# Altium PCB XIREI-TCP_V1.PcbDoc
Units mil, origin at the board's own origin, x right, y up, seen from the top; angles counter-clockwise.
Board outline 6000 x 4000 mil, 2 copper layers (Top Layer, Bottom Layer); 75 components, 33 nets, 311 pads, 72 vias.
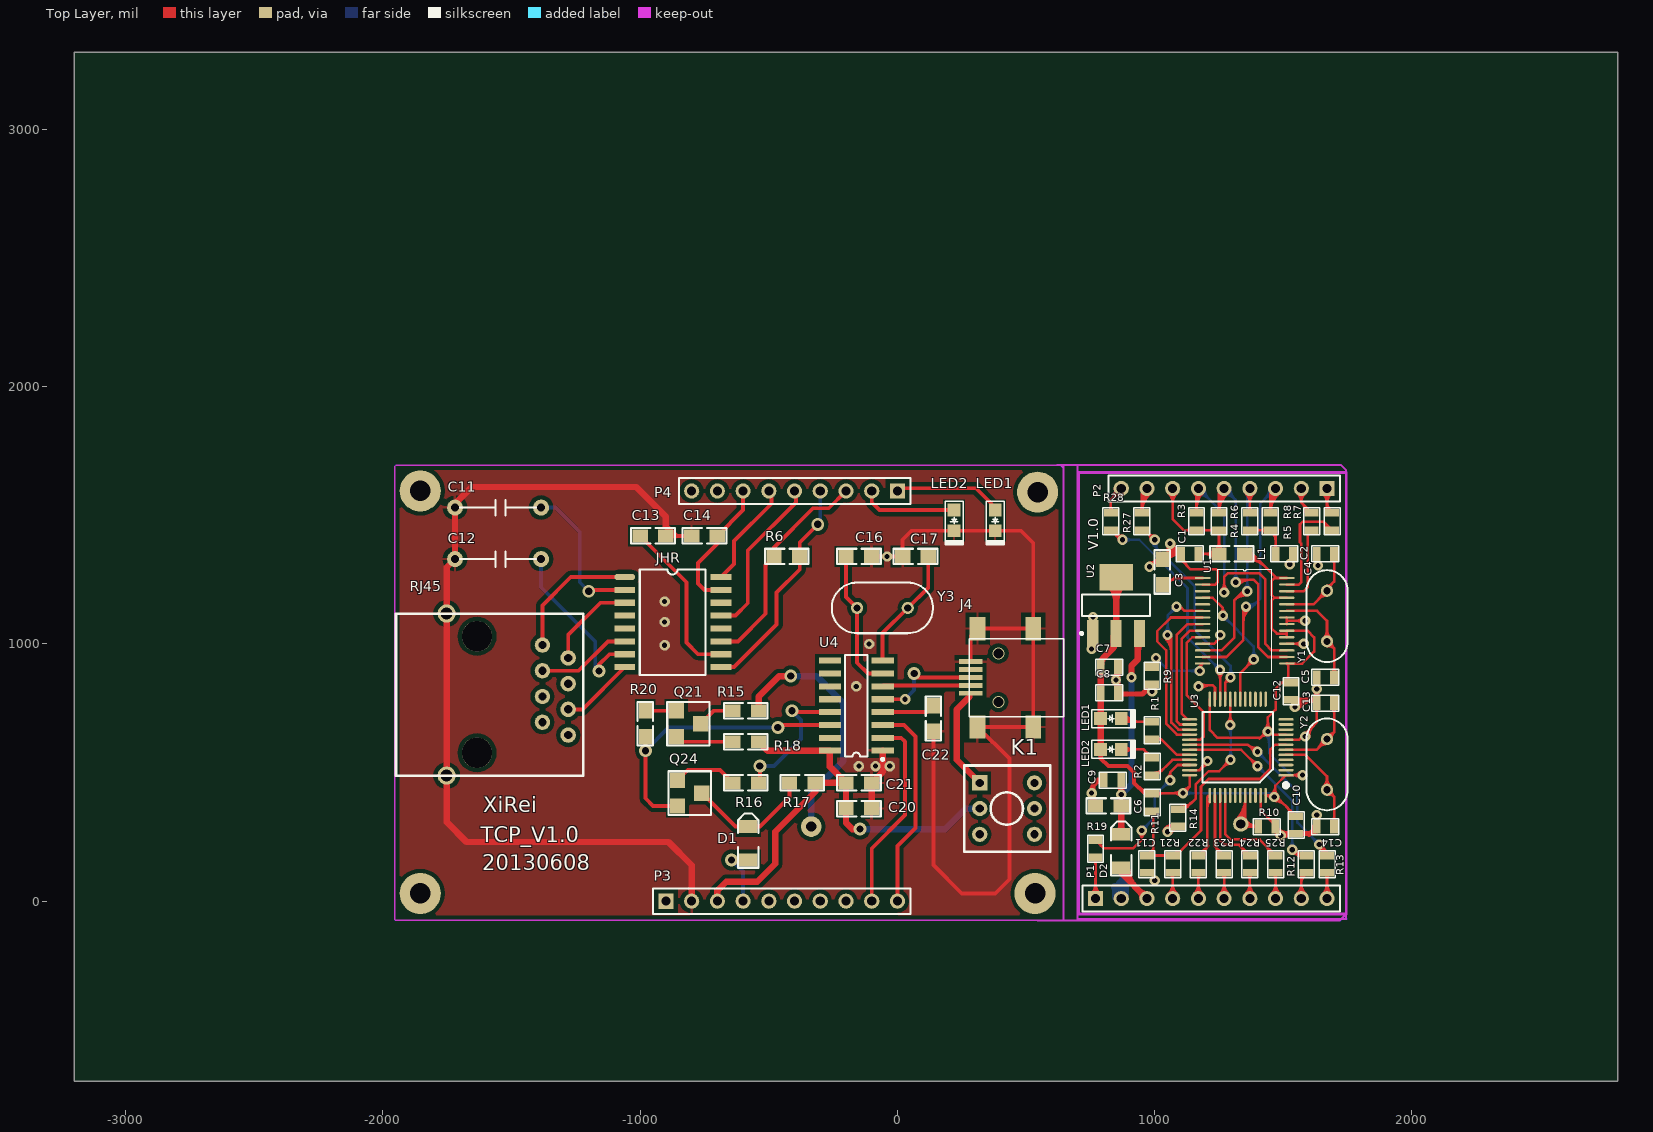
[diagram p0: Top Layer view]
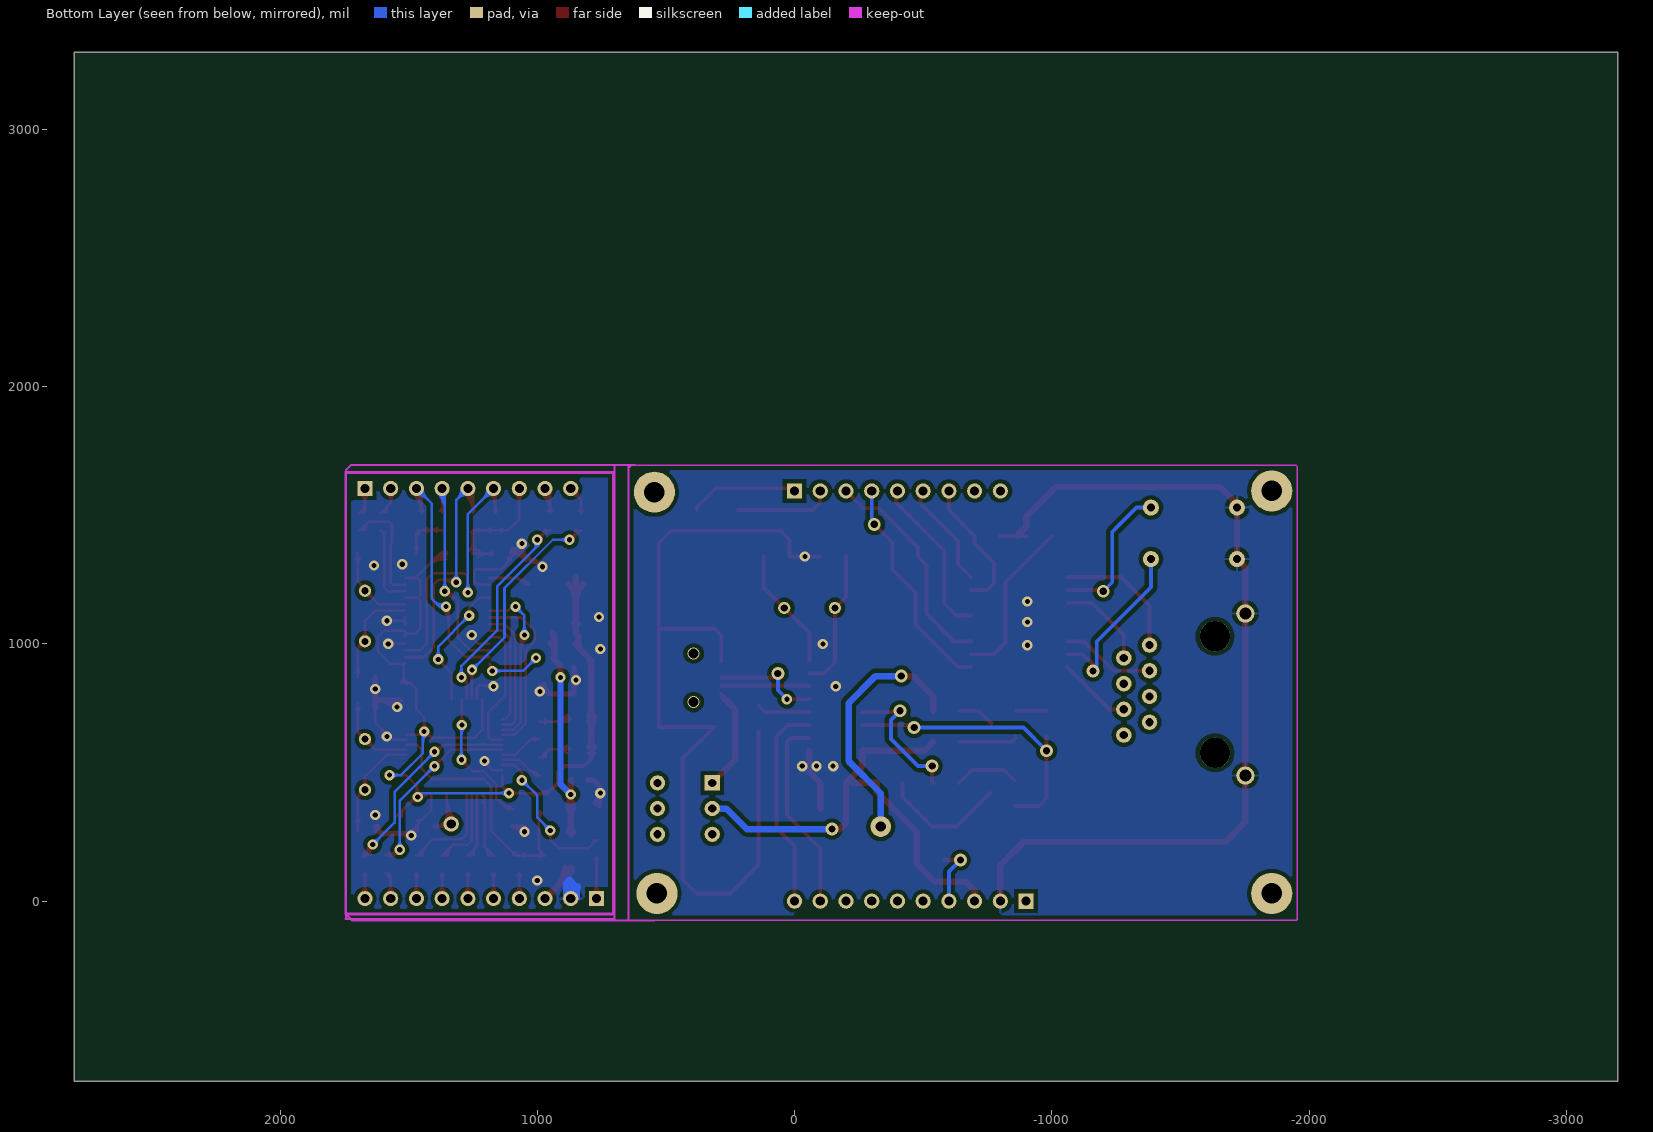
[diagram p1: Bottom Layer view, seen from below]

## Layer stack, top to bottom
Top Layer: signal copper 1.4
Dielectric: dielectric 12.6, FR-4, Dk 4.8
Bottom Layer: signal copper 1.4

## Board outline
-3200,-700 2800,-700 2800,3300 -3200,3300

## Design rules (kind name [scope] priority, off if disabled: settings)
Clearance [All] p1: gap=12
PolygonConnect [All] p1: connectstyle=Relief reliefconductorwidth=10 reliefentries=4 polygonreliefangle="90 Angle"
RoutingVias [All] p1: holewidth=20 width=40 viastyle="Through Hole" minholewidth=10 minwidth=20 maxholewidth=100 maxwidth=200
SilkscreenOverComponentPads [All] p1: minsilkscreentomaskgap=10
SolderMaskExpansion [All] p1: expansion=4
TestPointUsage [All] p1: valid=0 allowmultiple=FALSE
Testpoint [All] p1: side=15 testpointundercomponent=TRUE minsize=40 maxsize=100 preferedsize=60 minholesize=0 maxholesize=40 preferedholesize=32 testpointgrid=1 style=1023 order=0123456789
Width [All] p1: maxlimit=50 minlimit=10 preferedwidth=15
23 further rules are at their usual default settings.

## Classes and differential pairs
component class Sheet1: C11 C12 C13 C14 C16 C17 C20 C21 C22 D1 J4 JHR K1 LED1 LED2 P3 P4 Q21 Q24 R6 R15 R16 R17 R18 R20 RJ45 U4 Y3

## Components (designator, comment, footprint, x,y, rotation, side; value= is the part's Value field where it differs from the comment)
C1 "0.01uF" 0603 1170,1350 r270 top
C2 "0.01uF" 0603 1470,1350 r90 top
C3 "10uF" 0805 1030,1230 r270 top
C4 "30P" 0603 1630,1350 r90 top
C5 "30P" 0603 1630,870 r90 top
C6 "10UF" 0805 870,370 r0 top
C7 "0.1UF" 0603 790,910 r90 top
C8 "1UF" 0603 790,810 r90 top
C9 "0.1UF" 0603 870,470 r270 top
C10 "0.1UF" 0603 1550,330 r0 top
C11 "0.1uf" 0603 970,177.5 r0 top
C11 "103" C1 -1720,1530 r0 top
C12 "0.1UF" 0603 1530,850 r0 top
C12 "103" C1 -1720,1330 r0 top
C13 "20P" 0603 1630,770 r90 top
C13 "103" 0805 -900,1420 r0 top
C14 "20P" 0603 1630,290 r90 top
C14 "103" 0805 -700,1420 r0 top
C16 "22P" 0805 -100,1340 r0 top
C17 "22P" 0805 20,1340 r180 top
C20 "10uF" 0805 -100,360 r0 top
C21 "0.1uF" 0805 -100,460 r0 top
C22 "0.1uF" 0805 140,760 r90 top
D1 "4148" 4148 -580,160 r180 top
D2 "4148" 4148 870,130 r180 top
J4 "USBHOST" USB 280,1020 r270 top
JHR "" SMD-16B -1060,1260 r270 top
K1 "BUTTON" BTN8.5*8.5 320,460 r0 top
L1 "10UH" 0805 1250,1350 r180 top
LED1 "RED" LED0805 790,710 r0 top
LED1 "RED" LED0805 380,1520 r270 top
LED2 "YELLOW" LED0805 790,590 r0 top
LED2 "RED" LED0805 220,1520 r270 top
P1 "Header 10" HDR1X10 770,10 r0 top
P2 "Header 9" HDR1X9 1670,1604.49 r180 top
P3 "Header 10" HDR1X10 -900,0 r0 top
P4 "Header 9" HDR1X9 0,1594.49 r180 top
Q21 "8550" PNP-8550 -860,740 r0 top
Q24 "8050" NPN-8050 -760,420 r180 top
R1 "1K" 0603 990,630 r180 top
R2 "1K" 0603 990,490 r180 top
R3 "50R" 0603 1162.5,1510 r0 top
R4 "50R" 0603 1250,1510 r0 top
R5 "1k" 0603 1450,1510 r0 top
R6 "1k" 0603 1370,1510 r0 top
R6 "100" 0805 -380,1340 r0 top
R7 "2.7K" 0603 1690,1510 r0 top
R8 "2.7K" 0603 1610,1510 r0 top
R9 "2.7K" 0603 990,910 r0 top
R10 "100K" 0603 1470,290 r270 top
R11 "100K" 0603 990,350 r180 top
R12 "1K" 0603 1590,110 r180 top
R13 "1K" 0603 1670,110 r180 top
R14 "100K" 0603 1090,290 r180 top
R15 "1K" 0805 -640,740 r180 top
R16 "1K" 0805 -540,460 r0 top
R17 "10K" 0805 -420,460 r180 top
R18 "1K" 0805 -540,620 r0 top
R19 "220" 0603 770,170 r180 top
R20 "1k" 0805 -980,740 r90 top
R21 "220" 0603 1070,110 r180 top
R22 "220" 0603 1170,110 r180 top
R23 "220" 0603 1270,110 r180 top
R24 "220" 0603 1370,110 r180 top
R25 "220" 0603 1470,110 r180 top
R27 "220" 0603 950,1510 r0 top
R28 "220" 0603 830,1510 r0 top
RJ45 "CON10" RJ45 -1280,1000 r270 top
U1 "ENC28J60" ENC28J60_SSOP_28 1350,1090 r0 top
U2 "AMS1117-3p3" SOT230P700X160-4N 850,1150 r90 top
U3 "STM32" LQFP-48 1510,490 r180 top
U4 "CH340G" SO16 -160,760 r90 top
Y1 "25MHZ" XTAL_24M 1670,1010 r90 top
Y2 "8MHZ" XTAL_24M 1670,630 r270 top
Y3 "8MHZ" XTAL_24M 40,1140 r180 top

## Footprints (in the part's own frame and the unit in brackets; to place one, negate y for a bottom-side part, rotate by r counter-clockwise, add the part's x,y. Pads: shape width x height; smd on the part's side, far side on the other; paste and mask are expansions set on the pad)
0603 [mil]
  rect 55x30 smd: 1(0,0) 2(0,-67.5)
  silkscreen extent -31,-86 31,19
0805 [mil]
  rect 60x50 smd: 1(0,0) 2(-100,0)
  silkscreen extent -135,-30 35,30
4148 [mil]
  rect 70x50 smd: 1(0,0) 2(0,-130)
  silkscreen extent -40,-180 40,30
BTN8.5*8.5 [mm]
  rect 1.5x1.5 hole 0.8: 1(0,0)
  round 1.5 hole 0.8: 2(0,-2.54) 3(0,-5.08) 4(5.4,-5.08) 5(5.4,-2.54) 6(5.4,0)
  silkscreen extent -1.55,-6.79 6.95,1.71
C1 [mil]
  round 62 hole 32: 1(334.65,0) 2(0,0)
  silkscreen extent 20,-30 315,30
ENC28J60_SSOP_28 [mil]
  rect 60x9 smd: 1(-163.94,166.34)
  oval 60x9 smd: 2(-163.94,140.75) 3(-163.94,115.16) 4(-163.94,89.57) 5(-163.94,63.98) 6(-163.94,38.39) 7(-163.94,12.8) 8(-163.94,-12.8) 9(-163.94,-38.39) 10(-163.94,-63.98) 11(-163.94,-89.57) 12(-163.94,-115.16) 13(-163.94,-140.75) 14(-163.94,-166.34) 15(163.94,-166.34) 16(163.94,-140.75) 17(163.94,-115.16) 18(163.94,-89.57) 19(163.94,-63.98) 20(163.94,-38.39) 21(163.94,-12.8) 22(163.94,12.8) 23(163.94,38.39) 24(163.94,63.98) 25(163.94,89.57) 26(163.94,115.16) 27(163.94,140.75) 28(163.94,166.34)
  silkscreen extent -104,-201 104,201
HDR1X9 [mm] "Connector; Header; 9 Position"
  rect 1.5x1.5 hole 0.9: 1(0,0)
  round 1.5 hole 0.9: 2(2.54,0) 3(5.08,0) 4(7.62,0) 5(10.16,0) 6(12.7,0) 7(15.24,0) 8(17.78,0) 9(20.32,0)
  silkscreen extent -1.27,-1.27 21.59,1.27
HDR1X10 [mm] "Connector; Header; 10 Position"
  rect 1.5x1.5 hole 0.9: 1(0,0)
  round 1.5 hole 0.9: 2(2.54,0) 3(5.08,0) 4(7.62,0) 5(10.16,0) 6(12.7,0) 7(15.24,0) 8(17.78,0) 9(20.32,0) 10(22.86,0)
  silkscreen extent -1.27,-1.27 24.13,1.27
LED0805 [mil]
  rect 50x50 smd: 1(0,0) 2(80,0)
  silkscreen extent -35,-35 134,35
LQFP-48 [mm]
  rect 1.5x0.25 smd: 1(0,0)
  oval 1.5x0.25 smd: 2(0,-0.5) 3(0,-1) 4(0,-1.5) 5(0,-2) 6(0,-2.5) 7(0,-3) 8(0,-3.5) 9(0,-4) 10(0,-4.5) 11(0,-5) 12(0,-5.5) 25(9.5,-5.5) 26(9.5,-5) 27(9.5,-4.5) 28(9.5,-4) 29(9.5,-3.5) 30(9.5,-3) 31(9.5,-2.5) 32(9.5,-2) 33(9.5,-1.5) 34(9.5,-1) 35(9.5,-0.5) 36(9.5,0)
  oval 0.25x1.5 smd: 13(2,-7.5) 14(2.5,-7.5) 15(3,-7.5) 16(3.5,-7.5) 17(4,-7.5) 18(4.5,-7.5) 19(5,-7.5) 20(5.5,-7.5) 21(6,-7.5) 22(6.5,-7.5) 23(7,-7.5) 24(7.5,-7.5) 37(7.5,2) 38(7,2) 39(6.5,2) 40(6,2) 41(5.5,2) 42(5,2) 43(4.5,2) 44(4,2) 45(3.5,2) 46(3,2) 47(2.5,2) 48(2,2)
  silkscreen extent -0.2,-6.22 8.22,1.2
NPN-8050 [mil]
  rect 60x60 smd: B(95,-50) C(0,0) E(95,50)
  silkscreen extent -35,-85 130,85
PNP-8550 [mil]
  rect 60x60 smd: B(0,0) C(95,-50) E(0,-100)
  silkscreen extent -35,-135 130,35
RJ45 [mm]
  round 3 hole 3: 0(-0.75,-9) 0(10.75,-9)
  round 1.524 hole 0.813: 1(0.11,-2.54) 2(1.38,0) 3(2.65,-2.54) 4(3.92,0) 5(5.19,-2.54) 6(6.46,0) 7(7.73,-2.54) 8(9,0)
  round 1.8 hole 1.2: 9(-3,-12) 10(13,-12)
  silkscreen extent -3,-17 13,1.5
SMD-16B [mil]
  oval 24x80 smd: 1(0,0)
  rect 24x80 smd: 2(50,0) 3(100,0) 4(150,0) 5(200,0) 6(250,0) 7(300,0) 8(350,0) 9(350,374.02) 10(300,374.02) 11(250,374.02) 12(200,374.02) 13(150,374.02) 14(100,374.02) 15(50,374.02) 16(0,374.02)
  silkscreen extent -30,58 380,313
SO16 [mm]
  rect 0.6x2.2 smd: 1(-4.445,-2.6) 2(-3.175,-2.6) 3(-1.905,-2.6) 4(-0.635,-2.6) 5(0.635,-2.6) 6(1.905,-2.6) 7(3.175,-2.6) 8(4.445,-2.6) 9(4.445,2.6) 10(3.175,2.6) 11(1.905,2.6) 12(0.635,2.6) 13(-0.635,2.6) 14(-1.905,2.6) 15(-3.175,2.6) 16(-4.445,2.6)
  silkscreen extent -5.42,-2.72 5,1.1
SOT230P700X160-4N [mm]
  rect 2.65x1.1 smd: 1(-2.775,2.3) 2(-2.775,0) 3(-2.775,-2.3)
  rect 2.65x3.3 smd: 4(2.775,0)
  silkscreen extent -2.9,-3.35 1.05,3.52
USB [mm]
  rect 2.3x1.55 smd: 0(-1,6.3) 0(-1,0.8) 0(8.7,6.3) 0(8.7,0.8)
  rect 0.46x2.3 smd: 1(5.39,0.127) 2(4.605,0.127) 3(3.82,0.127) 4(3.035,0.127) 5(2.25,0.127)
  silkscreen extent 0,0 7.7,9.3
XTAL_24M [mm]
  round 1.2 hole 0.7: 1(0,0) 2(5,0)
  silkscreen extent -2.03,-2.03 7.03,2.03

## Part data
C1 C2 C3 C4 C5 C6 C7 C8 C9 C10 C11 C12 C13 C14 C16 C17 C20 C21 C22: library part CAP, "Capacitor"
C11 C12 C13 C14: library part CAP
D1 D2: library part DIODE
J4: "J4"
JHR: library part CON16, "Connector"
L1 R1 R2 R3 R4 R5 R6 R7 R8 R9 R10 R11 R12 R13 R14 R15 R16 R17 R18 R19 R20 R21 R22 R23 R24 R25 R27 R28: library part RES1
LED1 LED1 LED2 LED2: library part LED85YEL, "Yellow LED"
P1 P3: "Header, 10-Pin"
P2 P4: "Header, 9-Pin"
Q21: library part PNP
Q24: library part NPN
R6: library part RES2
RJ45: "Connector"
U1 U2 U3: library part Component_1
U4: library part MAX3232
Y1 Y2 Y3: library part XTAL, "Crystal Oscillator"

## Free pads (board coordinates)
  round 80 hole 40: 0(-335,290)
  round 160 hole 80: 1(-1855,30) 1(-1855,1595) 1(535,30) 1(545,1590)
  round 60 hole 36: 1(1335,300)

## Via types
v1: diameter 40, hole 20, Top Layer to Bottom Layer, 59 vias
v2: diameter 50, hole 28, Top Layer to Bottom Layer, 11 vias
v3: diameter 47.24, hole 39.37, Top Layer to Bottom Layer, 2 vias

## Nets (pads, with @x,y where several pads share a name; then routed paths per layer and width w, separated by ;. In a path a pad name is that pad's centre, name@x,y a point inside that pad or via, vN(x,y) a via of type N, cw(c..) or ccw(c..) an arc to the next point about the centre after c; other vN are vias at no path point)
5V: C20.2 C21.2 K1.2 P3.3 R17.2 R18.1 U4.16 | length 1969.2
  Top Layer w25: P3.3 -700,40 -665,75 -545,75 -475,145 -475,270 -320,425 R17.2 C21.2 ; R18.1 -505,585 U4.16 -262.36,560 -262.36,522.36 C21.2 ; v2(-145,280) -175,280 -200,305 C20.2 C21.2
  Bottom Layer w25: v2(-145,280) 185,280 265,360 K1.2
BOOT0-1: pad.0 R15.2 | length 1013.4
  Top Layer w25: R15.2@-540,760 R15.2 -540,795 -460,875 v2(-415,875)
  Bottom Layer w25: v2(-415,875) -315,875 -210,770 -210,545 -335,420 pad.0
"CH340 D+": J4.3 U4.5 | length 423.5
  Top Layer w15: U4.5 v1@25,785 ; v2(65,885) 80.39,869.61 J4.3
  Bottom Layer w15: v1(30,785) 65,820 v2(65,885)
"CH340 D-": J4.2 U4.6 | length 344.2
  Top Layer w15: U4.6 -53.94,838.7 J4.2
ERX+: JHR.6 RJ45.3 | length 367.4
  Top Layer w15: RJ45.3 -1239.33,895.67 -1125,1010 JHR.6
ERX-: JHR.8 RJ45.6 | length 288.1
  Top Layer w15: RJ45.6 -1224.33,745.67 JHR.8
ETX+: JHR.1 RJ45.1 | length 519.9
  Top Layer w15: RJ45.1 -1380,1150 -1270,1260 JHR.1
ETX-: JHR.3 RJ45.2 | length 361.1
  Top Layer w15: RJ45.2 -1280,1035 -1155,1160 JHR.3
GND: C11.2@-1720,1530 C12.2@-1720,1330 C13.1@-900,1420 C14.2@-800,1420 C16.1 C17.1 C20.1 C21.1 C22.2 J4.0 J4.5 LED1.2@380,1440 LED2.2@220,1440 P3.2 RJ45.9 RJ45.10 U4.1 | length 7280.3
  Top Layer w15: C13.1@-900,1420 -865,1420 C14.2@-800,1420 ; C16.1 C17.1 20,1405 55,1440 260,1440 480,1440 528.03,1391.97 J4.0@528.03,1059.37 ; C22.2 140,140 250,30 380,30 435,85 435,553.98 311.5,677.48 528.03,677.48 J4.0@528.03,1059.37 ; J4.5 285,1032.87 311.5,1059.37 J4.0@528.03,1059.37
  Top Layer w25: -865,1420 -900,1455 -900,1495 -1015,1610 -1655,1610 -1720,1545 -1720,1330 -1752.44,1297.56 RJ45.9 RJ45.10 -1752.44,307.44 -1675,230 -890,230 -800,140 P3.2 ; C20.1 C21.1 -57.64,502.36 U4.1
  other v1: -150,525 -85,525 -30,525 -160,835 -905,995 -110,1000 -905,1085 -905,1165 -40,1340
LEDA1: LED1.1@380,1520 P4.1 | length 425.4
  Top Layer w15: P4.1 10.51,1605 305,1605 380,1530 LED1.1@380,1520
LEDB1: LED2.1@220,1520 P4.2 | length 376.9
  Top Layer w15: P4.2 -100,1550 -70,1520 LED2.1@220,1520
NetC11_1: C11.1@-1385.35,1530 JHR.2 | length 576.3
  Top Layer w15: v2(-1200,1205) -1195,1210 JHR.2
  Bottom Layer w15: C11.1@-1385.35,1530 -1330,1530 -1260,1460 -1235,1435 -1235,1240 v2(-1200,1205)
NetC12_1: C12.1@-1385.35,1330 JHR.7 | length 724.9
  Top Layer w15: v2(-1160,895) -1160,920 -1120,960 JHR.7 -1115,960
  Bottom Layer w15: C12.1@-1385.35,1330 -1385.35,1220.35 -1175,1010 -1175,910 v2(-1160,895)
NetC13_2: C13.2@-1000,1420 JHR.10 | length 642.2
  Top Layer w15: C13.2@-1000,1420 -820,1240 -820,1005 -775,960 JHR.10
NetC16_2: C16.2 U4.7 Y3.2 | length 547.6
  Top Layer w15: C16.2 -200,1183.15 Y3.2 -156.85,926.85 -115,885 U4.7
NetC17_2: C17.2 U4.8 Y3.1 | length 478.6
  Top Layer w15: U4.8 -57.64,1042.36 Y3.1 120,1220 C17.2
NetC22_1: C22.1 U4.4 | length 208
  Top Layer w15: U4.4 115,735 C22.1
NetD1_2: D1.2 Q24.C R17.1 | length 496.5
  Top Layer w15: Q24.C -630,290 D1.2 -535,290 -420,405 R17.1
NetJ4_1: J4.1 K1.1 | length 407.9
  Top Layer w15: 280,795 285,800 J4.1
  Top Layer w25: 280,795 230,745 230,550 K1.1
NetQ21_B: Q21.B R20.1 | length 120
  Top Layer w15: R20.1 Q21.B
NetQ21_C: Q21.C R15.1 | length 145.7
  Top Layer w15: Q21.C -715,740 R15.1
NetQ21_E: Q21.E R18.2 | length 231.2
  Top Layer w15: Q21.E -860,635 -845,620 R18.2
NetQ24_B: Q24.B R16.2 | length 252.3
  Top Layer w15: Q24.B -815,510 -690,510 R16.2
NetQ24_E: Q24.E R20.2 U4.14 | length 1136.5
  Top Layer w15: R20.2 -980,400 -950,370 Q24.E ; v2(-465,675) -455,685 U4.14
  Bottom Layer w15: v2(-980,585) -890,675 v2(-465,675)
NetR16_1: R16.1 U4.13 | length 544.8
  Top Layer w15: R16.1 -535,465 v2(-535,525) ; v2(-410,740) -405,735 U4.13
  Bottom Layer w15: v2(-535,525) -480,525 -375,630 -375,705 v2(-410,740)
RXD: P3.10 U4.3 | length 815.3
  Top Layer w15: U4.3 25,685 70,640 70,285 0,215 P3.10
T_RST1: D1.1 P3.4 | length 243.6
  Top Layer w15: v2(-645,160) D1.1
  Bottom Layer w15: v2(-645,160) -600,115 P3.4
TCT1: C14.1@-700,1420 JHR.15 P4.7 | length 531.3
  Top Layer w15: JHR.15 -750,1210 -775,1235 -775,1315 -700,1390 -700,1420 -600,1520 P4.7
TPIN+1: JHR.11 P4.3 R6.2@-480,1340 | length 859.9
  Top Layer w15: JHR.11 -620,1010 -512.5,1117.5 -512.5,1307.5 -480,1340 -480,1375 -327.76,1527.24 -267.24,1527.24 P4.3
TPIN-1: JHR.9 P4.4 R6.1@-380,1340 | length 874.2
  Top Layer w15: JHR.9 -635,910 -470,1075 -470,1200 -380,1290 -380,1340 -380,1395 v2(-310,1465)
  Bottom Layer w15: v2(-310,1465) -300,1475 P4.4
TPOUT+1: JHR.16 P4.6 | length 419.8
  Top Layer w15: JHR.16 -635,1310.98 -635,1400 -490,1545 -490,1584.49 P4.6
TPOUT-1: JHR.13 P4.5 | length 639.9
  Top Layer w15: JHR.13 -630,1110 -582.05,1157.95 -582.05,1362.95 -395,1550 -395,1589.49 P4.5
TXD: P3.9 U4.2 | length 767.7
  Top Layer w15: P3.9 -100,205 30,335 30,620 15,635 U4.2
pads on no net: C1.1 C1.2 C2.1 C2.2 C3.1 C3.2 C4.1 C4.2 C5.1 C5.2 C6.1 C6.2 C7.1 C7.2 C8.1 C8.2 C9.1 C9.2 C10.1 C10.2 C11.1@970,177.5 C11.2@970,110 C12.1@1530,850 C12.2@1530,782.5 C13.1@1630,770 C13.2@1697.5,770 C14.1@1630,290 C14.2@1697.5,290 D2.1 D2.2 J4.4 JHR.4 JHR.5 JHR.12 JHR.14 K1.3 K1.4 K1.5 K1.6 L1.1 L1.2 LED1.1@790,710 LED1.2@870,710 LED2.1@790,590 LED2.2@870,590 P1.1 P1.2 P1.3 P1.4 P1.5 P1.6 P1.7 P1.8 P1.9 P1.10 P2.1 P2.2 P2.3 P2.4 P2.5 P2.6 P2.7 P2.8 P2.9 P3.1 P3.5 P3.6 P3.7 P3.8 P4.8 P4.9 R1.1 R1.2 R2.1 R2.2 R3.1 R3.2 R4.1 R4.2 R5.1 R5.2 R6.1@1370,1510 R6.2@1370,1442.5 R7.1 R7.2 R8.1 R8.2 R9.1 R9.2 R10.1 R10.2 R11.1 R11.2 R12.1 R12.2 R13.1 R13.2 R14.1 R14.2 R19.1 R19.2 R21.1 R21.2 R22.1 R22.2 R23.1 R23.2 R24.1 R24.2 R25.1 R25.2 R27.1 R27.2 R28.1 R28.2 RJ45.0 RJ45.4 RJ45.5 RJ45.7 RJ45.8 U1.1 U1.2 U1.3 U1.4 U1.5 U1.6 U1.7 U1.8 U1.9 U1.10 U1.11 U1.12 U1.13 U1.14 U1.15 U1.16 U1.17 U1.18 U1.19 U1.20 U1.21 U1.22 U1.23 U1.24 U1.25 U1.26 U1.27 U1.28 U2.1 U2.2 U2.3 U2.4 U3.1 U3.2 U3.3 U3.4 U3.5 U3.6 U3.7 U3.8 U3.9 U3.10 U3.11 U3.12 U3.13 U3.14 U3.15 U3.16 U3.17 U3.18 U3.19 U3.20 U3.21 U3.22 U3.23 U3.24 U3.25 U3.26 U3.27 U3.28 U3.29 U3.30 U3.31 U3.32 U3.33 U3.34 U3.35 U3.36 U3.37 U3.38 U3.39 U3.40 U3.41 U3.42 U3.43 U3.44 U3.45 U3.46 U3.47 U3.48 U4.9 U4.10 U4.11 U4.12 U4.15 Y1.1 Y1.2 Y2.1 Y2.2
copper on no net: | length 40396.9
  Top Layer w10: 752.66,27.34 ccw(c710.79,69.21) 770,69.21 ccw(c829.21,69.21) 787.34,27.34 ; 759.73,20.27 ccw(c734.93,45.07) 770,45.07 ccw(c805.07,45.07) 780.27,20.27 ; 762.93,162.93 cw(c745.86,145.86) 770,145.86 cw(c794.14,145.86) 777.07,162.93 ; 770,10 770,170 ; 770,237.5 802.5,205 915,205 950,240 ; 782.5,237.5 ccw(c812.68,237.5) 791.34,216.16 ; 822.93,1517.07 ccw(c805.86,1534.14) 830,1534.14 ccw(c854.14,1534.14) 837.07,1517.07 ; 830,1442.5 867.5,1405 v1(875,1405) ; 830,1510 830,1560 870,1600 870,1604.49 ; 832.25,1562.25 ccw(c798.96,1595.53) 845.67,1601.42 ; 835.79,1565.79 cw(c870,1531.58) 870,1579.96 ; 836.59,1435.91 ccw(c875,1474.32) v1@875,1420 ; 842.5,1442.5 ccw(c872.68,1442.5) 851.34,1421.16 ; 846.69,1576.69 ccw(c824.6,1598.77) 855.59,1602.67 ; 852.5,1442.5 ccw(c906.82,1442.5) v1@868.41,1404.09 ; 853.66,1418.84 ccw(c875,1440.18) v1@875,1410 ; 854.7,1417.8 cw(c841.89,1405) v1@860,1405 ; 877.07,717.07 ccw(c924.32,764.32) 924.32,697.5 ; 877.5,597.5 870,590 957.5,590 ; 884.14,575.86 cw(c918.28,541.72) 918.28,590 cw(c918.28,638.28) 884.14,604.14 ; 884.14,724.14 ccw(c948.46,788.46) 948.46,697.5 ; 900.18,697.5 cw(c900.18,740.18) 870,710 882.5,697.5 990,697.5 ; v1@939.66,264.14 cw(c916.67,240) 950,240 ; 942.93,1517.07 ccw(c925.86,1534.14) 950,1534.14 ccw(c974.14,1534.14) 957.07,1517.07 ; v1(950,275) 950,240 ; 950,1442.5 962.5,1442.5 v1(1000,1405) ; 950,1531.22 cw(c1030.47,1531.22) 979.25,1593.28 ; 950,1552.44 cw(c1012.96,1552.44) 972.88,1601 ; 950,1573.66 cw(c995.44,1573.66) 966.52,1608.71 ; v1@960.34,264.14 ccw(c983.33,240) 950,240 ; 962.5,1432.5 cw(c962.5,1408.36) 979.57,1425.43 cw(c996.64,1442.5) 972.5,1442.5 ; 967.62,559.03 ccw(c932.05,564.55) 957.5,590 ; 970,1604.49 950,1584.49 950,1510 cw(c1047.98,1510) 985.61,1585.57 ; 970.43,690.43 ccw(c953.36,673.36) 953.36,697.5 ccw(c953.36,721.64) 970.43,704.57 ; 971.43,576.07 cw(c956.18,560.81) 977.5,557.5 ; v1(980,1300) 1010,1330 1030,1330 ; v1@980,1315 ccw(c980,1351.21) 1005.61,1325.61 ccw(c1031.21,1300) v1@995,1300 ; v1@980.77,1300.77 cw(c1017.95,1263.59) 1028.07,1315.19 ; 982.5,177.5 cw(c1002.11,181.35) 987.98,195.48 ; 982.93,342.93 cw(c953.79,313.79) 995,313.79 ; 984.95,837.45 990,842.5 ; v1@985,1405 ccw(c948.79,1405) 974.39,1430.61 ccw(c1000,1456.21) v1@1000,1420 ; v1@986.06,811.92 cw(c1002.94,825.13) 987.78,840.28 ; 989.57,170.43 cw(c1006.64,153.36) 1006.64,177.5 cw(c1006.64,201.64) 989.57,184.57 ; 990,350 995,345 995,202.5 970,177.5 1070,177.5 1082.5,177.5 1180,275 1180,445 1210,475 1410,475 1450,515 1450,590 1468.11,608.11 1510,608.11 ; 990,417.5 992.5,420 v1(1110,420) 1135.98,445.98 1135.98,490 ; 990,490 1010,490 1069.06,549.06 1135.98,549.06 ; 990,557.5 957.5,590 ; 990,630 1025,630 ; v1@994.04,1314.04 cw(c1022.3,1285.78) 1030,1325 ; 1002.5,500 ccw(c1002.5,542.25) 1032.37,512.37 ; 1009.57,410.43 cw(c1032.68,387.32) 1032.68,420 ; 1009.57,424.57 ccw(c1020.61,435.61) 1020.61,420 ; 1009.92,623.3 cw(c1025,609.69) 1025,630 ; 1009.92,636.7 ccw(c1025,650.31) 1025,630 ; 1030,1230 1050,1250 1070,1250 1076.34,1256.34 1186.06,1256.34 ; 1030,1335 cw(c1061.73,1308.95) 1061.73,1350 ; 1037.73,1328.65 cw(c1082.88,1291.58) 1082.88,1350 ; v1@1039.39,1024.39 cw(c977.57,962.57) 1065,962.57 ; 1039.8,1233.03 cw(c1060.51,1228.88) 1060.51,1250 ; 1045.46,1322.31 cw(c1104.03,1274.21) 1104.03,1350 ; v1@1046.46,1031.46 cw(c1001.72,986.72) 1065,986.72 ; 1049.61,1231.07 cw(c1072.72,1226.43) 1072.72,1250 ; v1(1050,1035) 1065,1020 ; 1050.43,170.43 ccw(c1033.36,153.36) 1033.36,177.5 ccw(c1033.36,201.64) 1050.43,184.57 ; v1@1051,482 ccw(c1037.5,500) 1060,500 ; 1052.66,27.34 ccw(c1010.79,69.21) 1070,69.21 ccw(c1129.21,69.21) 1087.34,27.34 ; 1052.66,1587.14 cw(c1010.79,1545.27) 1070,1545.27 cw(c1129.21,1545.27) 1087.34,1587.14 ; v1@1053.54,1038.54 cw(c1025.86,1010.86) 1065,1010.86 ; v1@1056.47,1021.46 cw(c1059.7,1014.7) 1065,1020 ; 1059.73,20.27 ccw(c1034.93,45.07) 1070,45.07 ccw(c1105.07,45.07) 1080.27,20.27 ; 1059.73,1594.22 cw(c1034.93,1569.42) 1070,1569.42 cw(c1105.07,1569.42) 1080.27,1594.22 ; v1(1060,470) 1060,500 ; v1@1060,1375 cw(c1060,1350.86) 1077.07,1367.93 1095.43,1349.57 ; 1062.93,102.93 cw(c1045.86,85.86) 1070,85.86 cw(c1094.14,85.86) 1077.07,102.93 ; v1@1063.54,1028.53 ccw(c1070.3,1025.3) 1065,1020 ; v1@1065,1390 ccw(c1089.14,1390) 1072.07,1372.93 ; v1@1069,482 cw(c1082.5,500) 1060,500 ; 1070,10 1070,110 ; 1070,1604.49 1070,1485 1112.5,1442.5 1162.5,1442.5 1250,1442.5 1250,1350 1170,1350 ; 1073.46,1371.54 ccw(c1096.58,1394.66) 1102.5,1362.5 ; v1@1075,1390 ccw(c1123.28,1390) 1089.14,1355.86 ; 1075.43,1349.57 1095.43,1349.57 ; 1082.5,187.5 ccw(c1082.5,211.64) 1099.57,194.57 ccw(c1116.64,177.5) 1092.5,177.5 ; 1085,700 1098.15,686.85 1135.98,686.85 ; 1086.42,701.42 1085,702.83 1085,1035 1127.2,1077.2 1147.2,1077.2 ; 1086.92,1358.08 ccw(c1100.77,1371.92) 1104.31,1352.67 ; 1090,357.5 1117.5,357.5 1160,400 1160,455 1210,505 1250,505 v1(1295,550) ; 1095,1350 1050,1350 1050,1380 v1(1060,1390) 1060,1385 ccw(c1092.4,1417.4) 1100.69,1372.33 ; 1095.43,1357.07 cw(c1078.36,1374.14) 1078.36,1350 cw(c1078.36,1325.86) 1095.43,1342.93 1095.43,1349.57 ; v1@1099.39,409.39 ccw(c1073.79,383.79) 1073.79,420 ccw(c1073.79,456.21) v1@1099.39,430.61 ; 1102.5,357.5 ccw(c1102.5,393.71) 1128.11,368.11 ; 1102.5,367.5 ccw(c1102.5,427.86) 1145.18,385.18 ; 1102.5,1327.5 1140,1290 1240,1290 1245,1285 1245,1240 1235.75,1230.75 1186.06,1230.75 ; 1102.5,1337.5 ccw(c1126.64,1337.5) 1109.57,1320.43 ; 1105,1140 1116.61,1128.39 1186.06,1128.39 ; v1@1110,435 ccw(c1110,471.21) 1135.61,445.61 ccw(c1161.21,420) v1@1125,420 ; 1112.5,1337.5 ccw(c1160.78,1337.5) 1126.64,1303.36 ; 1135.98,509.69 1174.69,509.69 1205,540 v1(1205,545) ; 1135.98,529.37 1089.37,529.37 1060,500 ; 1135.98,568.74 1086.26,568.74 1025,630 ; 1135.98,588.43 1336.57,588.43 v1(1400,525) ; 1135.98,608.11 1361.89,608.11 ; 1135.98,627.8 1177.8,627.8 1190,640 1190,735 1125,800 1125,1005 1146.02,1026.02 1186.06,1026.02 ; 1135.98,647.48 1086.61,647.48 1047,687.09 1044.93,689.16 1044.93,915.07 1044.93,975.07 1010,1010 1010,1050 1062.8,1102.8 1186.06,1102.8 ; 1135.98,667.17 1092.38,667.17 1065,694.54 1065,1020 ; 1135.98,706.54 1128.46,706.54 1105,730 1105,995.21 1105,1020 1136.61,1051.61 1186.06,1051.61 ; 1142.93,1435.43 ccw(c1125.86,1418.36) 1125.86,1442.5 ccw(c1125.86,1466.64) 1142.93,1449.57 ; 1147.2,1077.03 1147.2,1077.2 ; 1152.66,27.34 ccw(c1110.79,69.21) 1170,69.21 ccw(c1229.21,69.21) 1187.34,27.34 ; 1152.66,1587.14 cw(c1128.89,1563.38) 1162.5,1563.38 ; 1155.43,1517.07 ccw(c1138.36,1534.14) 1162.5,1534.14 ccw(c1186.64,1534.14) 1169.57,1517.07 ; 1159.73,20.27 ccw(c1134.93,45.07) 1170,45.07 ccw(c1205.07,45.07) 1180.27,20.27 ; 1162.5,1510 1162.5,1596.99 1170,1604.49 ; 1162.5,1527.17 cw(c1247.32,1527.17) 1187.34,1587.14 ; 1162.5,1551.31 cw(c1223.18,1551.31) 1180.27,1594.22 ; 1162.5,1575.45 cw(c1199.04,1575.45) 1173.2,1601.29 ; 1162.93,102.93 cw(c1145.86,85.86) 1170,85.86 cw(c1194.14,85.86) 1177.07,102.93 ; 1170,10 1170,110 ; 1170,177.5 1205,212.5 1205,401.54 ; v1(1170,835) 1175,840 1225,840 1234.41,830.59 1234.41,785.28 ; v1@1173.54,831.46 cw(c1194.14,810.86) 1194.14,840 cw(c1194.14,859.14) v1@1180.61,845.61 ; 1177.07,1342.93 cw(c1194.14,1325.86) 1194.14,1350 cw(c1194.14,1374.14) 1177.07,1357.07 ; 1177.19,512.19 ccw(c1146.19,543.19) v1@1190.01,544.54 ; v1@1179.6,896.97 cw(c1200.5,905.93) 1184.42,922.02 ; v1@1180.61,824.39 cw(c1218.28,786.72) 1218.28,840 ; 1182.07,1435.43 cw(c1199.14,1418.36) 1199.14,1442.5 cw(c1199.14,1466.64) 1182.07,1449.57 ; 1182.5,177.5 cw(c1212.68,177.5) 1191.34,198.84 ; v1@1185,885 v1(1175,895) 1175,912.6 1186.06,923.66 ; 1186.06,949.25 1279.25,949.25 1345,1015 1345,1135 v1(1355,1145) ; 1186.06,974.84 1259.84,974.84 1310,1025 1310,1170 v1@1345,1205 ; 1186.06,1000.43 1230.43,1000.43 1240,1010 ; 1186.06,1077.2 1147.2,1077.2 ; 1186.06,1179.57 1225.43,1179.57 1265,1140 ; 1187.93,522.93 cw(c1205,505.86) v1@1205,530 ; 1192.5,177.5 cw(c1246.82,177.5) 1208.41,215.91 ; 1193.54,528.54 ccw(c1177.92,544.16) v1@1200,544.85 ; 1205,363.37 cw(c1238.01,363.37) 1214.67,386.71 ; 1214.72,411.26 1205,401.54 ; 1214.72,411.34 ccw(c1214.8,401.54) 1205,401.54 ; 1214.72,785.28 1214.72,665.28 1245,635 1410,635 v1@1440,665 ; 1230.43,1435.43 ccw(c1213.36,1418.36) 1213.36,1442.5 ccw(c1213.36,1466.64) 1230.43,1449.57 ; 1230.86,1335.86 ccw(c1196.72,1301.72) 1196.72,1350 ccw(c1196.72,1398.28) 1230.86,1364.14 ; 1234.41,411.26 1234.41,213.09 ; 1235.86,1364.14 ccw(c1201.72,1398.28) 1250,1398.28 ccw(c1298.28,1398.28) 1264.14,1364.14 ; 1242.93,1435.43 cw(c1225.86,1418.36) 1250,1418.36 cw(c1274.14,1418.36) 1257.07,1435.43 ; 1242.93,1517.07 ccw(c1225.86,1534.14) 1250,1534.14 ccw(c1274.14,1534.14) 1257.07,1517.07 ; v1@1243.49,888.49 cw(c1217.88,862.88) 1254.09,862.88 cw(c1290.31,862.88) v1@1264.7,888.49 ; 1247.52,178.17 ccw(c1202.52,181.19) 1234.41,213.09 ; 1249.99,197.51 cw(c1231.7,179.23) 1257.5,177.5 ; v1@1250,1020 1240,1010 ; 1250,1531.22 cw(c1330.47,1531.22) 1279.25,1593.28 ; 1250,1552.44 cw(c1312.96,1552.44) 1272.88,1601 ; 1250,1573.66 cw(c1295.44,1573.66) 1266.52,1608.71 ; 1252.66,27.34 ccw(c1210.79,69.21) 1270,69.21 ccw(c1329.21,69.21) 1287.34,27.34 ; 1254.09,411.26 1255,410.35 1255,235 1270,220 1327.5,220 1370,177.5 ; 1254.09,785.28 v1(1254.09,899.09) ; v1@1255,1025 1240,1010 ; v1@1256,1122 ccw(c1242.5,1140) 1265,1140 ; v1@1259.39,1210.61 ccw(c1233.79,1236.21) 1270,1236.21 ccw(c1306.21,1236.21) v1@1280.61,1210.61 ; 1259.73,20.27 ccw(c1234.93,45.07) 1270,45.07 ccw(c1305.07,45.07) 1280.27,20.27 ; 1262.93,102.93 cw(c1245.86,85.86) 1270,85.86 cw(c1294.14,85.86) 1277.07,102.93 ; v1(1265,1110) 1265,1140 ; 1270,10 1270,110 ; 1270,177.5 1234.41,213.09 ; v1(1270,1200) v1@1280,1190 ; v1@1270,1205 1270,1260 1285,1275 1405,1275 1430,1250 1430,1000 1455,975 1513.78,975 1513.94,974.84 ; 1270,1604.49 1250,1584.49 1250,1510 cw(c1347.98,1510) 1285.61,1585.57 ; 1273.78,411.26 1273.78,261.22 1295,240 1407.5,240 1470,177.5 ; 1273.78,785.28 1273.78,848.78 ; v1@1274,1122 cw(c1287.5,1140) 1265,1140 ; v1@1280,550 cw(c1243.79,550) 1269.39,524.39 cw(c1295,498.79) v1@1295,535 ; v1@1280.15,867.88 cw(c1257.86,864.7) 1273.78,848.78 ; v1@1282.86,695.61 ccw(c1257.25,721.21) 1293.46,721.21 ccw(c1329.68,721.21) v1@1304.07,695.61 ; v1@1292.88,855.15 ccw(c1289.7,832.86) 1273.78,848.78 ; v1(1293.46,685) 1293.46,785.28 ; v1(1295,870) 1273.78,848.78 ; 1308.79,1168.79 cw(c1360,1117.57) v1@1360,1190 ; v1@1315,1250 1385,1250 1402.5,1232.5 1402.5,987.5 1440.75,949.25 1513.94,949.25 ; 1317.32,317.68 ccw(c1232.35,402.65) 1352.52,402.65 ; v1@1318.54,1236.46 cw(c1351.21,1203.79) 1351.21,1250 ; 1324.39,310.61 ccw(c1256.49,378.51) 1352.52,378.51 ; v1@1325.61,1229.39 cw(c1375.36,1179.64) 1375.36,1250 ; 1325.86,1185.86 cw(c1360,1151.72) v1@1360,1200 ; 1331.46,303.54 ccw(c1280.63,354.37) 1352.52,354.37 ; 1331.59,215.91 cw(c1293.18,177.5) 1347.5,177.5 ; 1332.83,785.28 1332.83,887.83 v1(1385,940) ; 1338.54,296.46 ccw(c1304.77,330.23) 1352.52,330.23 ; 1339.06,302.92 ccw(c1364.24,321) 1364.24,290 ; 1345,1084.64 cw(c1415.36,1084.64) v1@1365.61,1134.39 ; 1345,1108.79 cw(c1391.21,1108.79) v1@1358.54,1141.46 ; 1347.18,308.75 ccw(c1383.74,335.01) 1383.74,290 ; 1348.66,198.84 cw(c1327.32,177.5) 1357.5,177.5 ; 1350,1350 1380,1350 1473.66,1256.34 ; 1352.52,411.26 1352.52,317.52 1335,300 1348.54,300 1358.54,290 1402.5,290 ; 1352.66,27.34 ccw(c1310.79,69.21) 1370,69.21 ccw(c1429.21,69.21) 1387.34,27.34 ; 1352.66,1587.14 cw(c1310.79,1545.27) 1370,1545.27 cw(c1429.21,1545.27) 1387.34,1587.14 ; 1352.68,282.32 cw(c1371.21,263.79) 1371.21,290 ; 1355,1330 cw(c1355,1221.36) 1431.82,1298.18 ; 1355,1340 cw(c1355,1255.5) 1414.75,1315.25 ; 1355,1350 cw(c1355,1289.64) 1397.68,1332.32 ; 1355,1360 cw(c1355,1323.79) 1380.61,1349.39 ; 1355.3,314.58 ccw(c1403.23,349.01) 1403.23,290 ; 1359.73,20.27 ccw(c1334.93,45.07) 1370,45.07 ccw(c1405.07,45.07) 1380.27,20.27 ; 1359.73,1594.22 cw(c1334.93,1569.42) 1370,1569.42 cw(c1405.07,1569.42) 1380.27,1594.22 ; 1362.93,102.93 cw(c1345.86,85.86) 1370,85.86 cw(c1394.14,85.86) 1377.07,102.93 ; 1362.93,1517.07 ccw(c1345.86,1534.14) 1370,1534.14 ccw(c1394.14,1534.14) 1377.07,1517.07 ; 1370,10 1370,110 ; v1@1370,940 cw(c1333.79,940) 1359.39,914.39 cw(c1385,888.79) v1@1385,925 ; 1370,1442.5 1450,1442.5 1470,1422.5 ; 1370,1510 1370,1604.49 ; 1376.58,593.42 ccw(c1395.73,612.57) v1@1398.75,585.66 ; 1380.77,589.23 cw(c1372.24,580.69) v1@1384.31,580.69 ; v1@1385,525 ccw(c1348.79,525) 1374.39,550.61 ccw(c1400,576.21) v1@1400,540 ; 1389.57,1435.43 cw(c1406.64,1418.36) 1406.64,1442.5 cw(c1406.64,1466.64) 1389.57,1449.57 ; 1395.43,282.93 ccw(c1378.36,265.86) 1378.36,290 ccw(c1378.36,314.14) 1395.43,297.07 ; v1@1397.63,595.6 cw(c1392.76,638.97) 1361.89,608.11 ; v1(1399.31,580.69) 1389.31,580.69 1361.89,608.11 ; 1407.5,632.5 cw(c1437.78,602.22) v1@1439.42,645.01 ; 1411.57,411.26 1411.57,353.43 1470,295 ; 1417.93,642.93 ccw(c1400.86,660) v1@1425,660 ; v1@1429.39,670.61 ccw(c1403.79,696.21) 1440,696.21 ccw(c1476.21,696.21) v1@1450.61,670.61 ; 1430.43,1435.43 ccw(c1413.36,1418.36) 1413.36,1442.5 ccw(c1413.36,1466.64) 1430.43,1449.57 ; 1431.59,215.91 cw(c1393.18,177.5) 1447.5,177.5 ; 1440.13,324.87 ccw(c1470,354.75) 1470,312.5 ; 1442.93,1517.07 ccw(c1425.86,1534.14) 1450,1534.14 ccw(c1474.14,1534.14) 1457.07,1517.07 ; 1443.9,411.26 ccw(c1443.9,426.1) v1@1454.39,415.61 ; 1448.66,198.84 cw(c1427.32,177.5) 1457.5,177.5 ; 1450,1531.22 cw(c1530.47,1531.22) 1479.25,1593.28 ; 1450,1552.44 cw(c1512.96,1552.44) 1472.88,1601 ; 1450,1573.66 cw(c1495.44,1573.66) 1466.52,1608.71 ; v1@1451.47,398.53 ccw(c1431.26,388.86) 1431.26,411.26 v1@1468.74,411.26 ; 1452.66,27.34 ccw(c1410.79,69.21) 1470,69.21 ccw(c1529.21,69.21) 1487.34,27.34 ; v1@1454.65,415.86 ccw(c1423.33,448.74) 1468.74,448.74 ; 1455.43,1435.43 cw(c1420.25,1400.25) 1470,1400.25 ; 1459.73,20.27 ccw(c1434.93,45.07) 1470,45.07 ccw(c1505.07,45.07) 1480.27,20.27 ; 1461.17,1432.59 cw(c1459.82,1422.5) 1470,1422.5 ; v1@1461.55,408.62 ccw(c1445.57,425.4) 1468.74,425.4 ; 1462.93,102.93 cw(c1445.86,85.86) 1470,85.86 cw(c1494.14,85.86) 1477.07,102.93 ; 1462.93,1369.57 ccw(c1445.86,1386.64) 1470,1386.64 ccw(c1494.14,1386.64) 1477.07,1369.57 ; v1@1465,390 cw(c1465,329.64) 1507.68,372.32 ; v1@1465,400 cw(c1465,363.79) 1490.61,389.39 ; 1465.63,1426.87 cw(c1475.8,1437.04) 1462.5,1442.5 cw(c1444.39,1424.39) 1470,1424.39 ; 1468.74,432.18 ccw(c1492.18,432.18) v1@1475.61,415.61 ; 1470,10 1470,110 ; 1470,1350 1470,1422.5 ; 1470,1604.49 1450,1584.49 1450,1510 cw(c1547.98,1510) 1485.61,1585.57 ; v1@1480,405 ccw(c1492.07,405) 1483.54,396.46 ; 1510,568.74 1586.26,568.74 1670,485 1670,433.15 1697.5,405.65 ; 1510,588.43 1628.42,588.43 1670,630 1697.5,657.5 ; 1510,627.8 1562.8,627.8 1630,695 1630,770 ; 1510,647.48 1457.52,647.48 v1@1440,665 ; 1510.08,843.3 ccw(c1495,829.69) 1495,850 ; 1510.08,856.7 cw(c1495,870.31) 1495,850 ; 1510.43,857.07 ccw(c1487.32,880.18) 1520,880.18 ; 1511.59,368.41 cw(c1473.18,330) 1527.5,330 ; 1513.94,1000.43 v1(1579.57,1000.43) ; 1513.94,1026.02 1513.94,1040 ; 1513.94,1077.2 1513.94,1102.8 ; 1513.94,1090 v1(1585,1090) ; 1513.94,1128.39 1631.61,1128.39 1670,1090 1670,1010 1697.5,982.5 ; 1513.94,1153.98 1617.13,1153.98 1670,1206.85 1670,1215 1697.5,1242.5 1697.5,1350 ; 1513.94,1179.57 1465.43,1179.57 ; 1513.94,1205.16 1580.16,1205.16 1595,1220 1595,1427.5 1610,1442.5 ; 1513.94,1230.75 1560.75,1230.75 1570,1240 1570,1390 1565,1395 1565,1465 1575,1475 1657.5,1475 ; 1513.94,1256.34 1473.66,1256.34 ; 1513.98,924.16 cw(c1513.41,917.6) 1520,917.6 ; 1514.29,924.02 cw(c1500.5,910.23) 1520,910.23 ; 1520,868.11 ccw(c1535.61,868.11) 1524.57,857.07 ; 1528.66,351.34 cw(c1507.32,330) 1537.5,330 ; v1@1536.43,185.07 cw(c1538.94,158.94) 1557.5,177.5 ; v1@1548.46,186.54 ccw(c1571.58,209.66) 1577.5,177.5 ; v1@1549.93,198.57 ccw(c1576.06,196.06) 1557.5,177.5 ; 1550,330 v1@1468.74,411.26 ; 1552.66,27.34 ccw(c1510.79,69.21) 1570,69.21 ccw(c1629.21,69.21) 1587.34,27.34 ; 1553.74,1586.13 cw(c1521.75,1550) 1570,1550 ; 1559.73,20.27 ccw(c1534.93,45.07) 1570,45.07 ccw(c1605.07,45.07) 1580.27,20.27 ; 1560.37,1593.61 cw(c1541.42,1572.22) 1570,1572.22 cw(c1598.58,1572.22) 1579.63,1593.61 ; v1@1564.39,479.39 ccw(c1538.79,453.79) 1538.79,490 ccw(c1538.79,526.21) v1@1564.39,500.61 ; 1566.46,631.46 ccw(c1557.93,640) v1@1570,640 ; v1@1568.96,989.83 ccw(c1543.35,964.22) 1543.35,1000.43 ccw(c1543.35,1036.65) v1@1568.96,1011.04 ; 1569.5,171.5 ccw(c1557.5,162.5) 1557.5,177.5 ; 1569.5,183.5 cw(c1557.5,192.5) 1557.5,177.5 ; 1570,10 1570,90 ; 1570,67.75 cw(c1619.75,67.75) 1584.57,102.93 ; 1570,91.89 cw(c1595.61,91.89) 1577.5,110 ; 1570,1604.49 1570,1550 ; 1571.59,1548.41 cw(c1533.18,1510) 1587.5,1510 ; v1@1574.39,1079.39 ccw(c1548.79,1053.79) 1548.79,1090 ccw(c1548.79,1126.21) v1@1574.39,1100.61 ; v1(1575,490) 1570,495 1565,490 1510,490 1468.74,448.74 ; 1575.69,187.33 cw(c1567.4,232.4) v1(1535,200) 1557.5,177.5 ; 1578.83,100.09 ccw(c1580.18,90) 1570,90 ; v1@1585,655 ccw(c1585,667.07) 1593.54,658.54 ; 1586.26,1586.13 ccw(c1618.25,1550) 1570,1550 ; 1588.66,1531.34 cw(c1567.32,1510) 1597.5,1510 ; 1590,110 1570,90 ; 1590,177.5 1557.5,177.5 ; v1@1590,640 cw(c1626.21,640) 1600.61,665.61 ; 1590.43,1435.43 cw(c1579.39,1424.39) 1595,1424.39 ; 1595,1412.32 cw(c1627.68,1412.32) 1604.57,1435.43 ; v1@1600,640 cw(c1660.36,640) 1617.68,682.68 ; 1610,1510 1570,1550 ; 1622.93,750.43 cw(c1605.86,733.36) 1630,733.36 cw(c1654.14,733.36) 1637.07,750.43 ; v1@1640,205 cw(c1640,168.79) 1665.61,194.39 cw(c1691.21,220) v1@1655,220 ; 1648.18,181.12 ccw(c1614.29,194.29) v1(1640,220) 1670,190 1670,177.5 ; 1650,1584.49 1670,1604.49 1670,1530 ; v1@1650.84,209.16 cw(c1629.9,188.23) 1657.5,177.5 ; 1651.38,630 cw(c1606.42,630) 1638.21,598.21 cw(c1670,566.42) 1670,611.38 ; 1651.38,1206.85 cw(c1606.42,1206.85) 1638.21,1175.06 cw(c1670,1143.27) 1670,1188.23 ; 1652.66,27.34 ccw(c1610.79,69.21) 1670,69.21 ccw(c1729.21,69.21) 1687.34,27.34 ; 1652.66,1587.14 cw(c1610.79,1545.27) 1670,1545.27 cw(c1729.21,1545.27) 1687.34,1587.14 ; 1656.83,446.32 ccw(c1625.04,478.11) 1670,478.11 ccw(c1714.96,478.11) 1683.17,446.32 ; 1656.83,1023.17 ccw(c1625.04,1054.96) 1670,1054.96 ccw(c1714.96,1054.96) 1683.17,1023.17 ; 1659.73,20.27 ccw(c1634.93,45.07) 1670,45.07 ccw(c1705.07,45.07) 1680.27,20.27 ; 1659.73,1594.22 cw(c1634.93,1569.42) 1670,1569.42 cw(c1705.07,1569.42) 1680.27,1594.22 ; 1661.68,198.32 cw(c1645.52,182.16) 1666.82,173.88 ; 1662.93,102.93 cw(c1645.86,85.86) 1670,85.86 cw(c1694.14,85.86) 1677.07,102.93 ; 1667.62,1444.03 ccw(c1632.05,1449.55) 1657.5,1475 ; 1670,10 1670,110 ; 1670,1225.47 ccw(c1670,1250.75) 1687.88,1232.88 ; 1670,1528.11 ccw(c1695.61,1528.11) 1677.5,1510 ; 1670,1552.25 ccw(c1719.75,1552.25) 1684.57,1517.07 ; 1670.21,1516.84 ccw(c1663.31,1523.31) 1670,1530 ; 1671.43,1461.07 cw(c1656.18,1445.81) 1677.5,1442.5 ; 1672,414.64 cw(c1675.37,383.52) 1697.5,405.65 ; 1672,648.51 ccw(c1675.37,679.63) 1697.5,657.5 ; 1672,991.49 cw(c1675.37,960.37) 1697.5,982.5 ; 1672.52,187.48 cw(c1661.13,176.09) 1676.14,170.25 ; 1678.56,1207.84 cw(c1707.68,1211.23) 1686.95,1231.95 ; 1678.83,1519.91 cw(c1680.18,1530) 1670,1530 ; 1688.51,431.15 ccw(c1719.63,427.78) 1697.5,405.65 ; 1688.51,632 cw(c1719.63,635.37) 1697.5,657.5 ; 1688.51,1008 ccw(c1719.63,1004.63) 1697.5,982.5 ; 1690,1442.5 1657.5,1475 ; 1690,1510 1670,1530 ; 1690.43,309.57 ccw(c1673.36,326.64) 1697.5,326.64 ccw(c1721.64,326.64) 1704.57,309.57 ; 1690.43,750.43 cw(c1673.36,733.36) 1697.5,733.36 cw(c1721.64,733.36) 1704.57,750.43 ; 1690.43,889.57 ccw(c1673.36,906.64) 1697.5,906.64 ccw(c1721.64,906.64) 1704.57,889.57 ; 1690.43,1330.43 cw(c1673.36,1313.36) 1697.5,1313.36 cw(c1721.64,1313.36) 1704.57,1330.43 ; 1697.5,270 1697.5,290 1697.5,405.65 ; 1697.5,770 1697.5,657.5 ; 1697.5,870 1697.5,982.5 ; v1@1440,665 1440,715 1470,745 1470,825 1495,850 ; 1465.43,1179.57 1455,1190 1455,1245 1466.34,1256.34 1473.66,1256.34 ; 1465.43,1179.57 1455,1169.14 1455,1060 1475,1040 1513.94,1040 ; v1@1468.74,411.26 1468.74,448.74 ; 1495,850 1530,850 1520,860 1520,917.6 ; 1513.94,1040 1513.94,1051.61 1593.39,1051.61 1620,1025 1620,970 1573.66,923.66 1513.94,923.66 1520,917.6 ; 1246.46,1016.46 cw(c1255,1007.93) 1255,1020 ccw(c1255,1007.93) 1246.46,1016.46 ; 1700,1350 1700,1355 1700,1350
  Top Layer w15: 779.5,576 cw(c763.75,555) 790,555 ; 790,590 790,555 ; 800.5,576 ccw(c816.25,555) 790,555 ; 939.09,440.91 ccw(c977.5,479.32) 977.5,425 ; 990,417.5 962.5,417.5 920,460 920,500 895,525 820,525 790,555
  Top Layer w20: v1@747.93,412.93 cw(c718.79,383.79) 760,383.79 ; v1@749,428 ccw(c732.5,450) 760,450 ; 760,370 760,450 ; v1@760,418.28 ccw(c813.28,418.28) 775.61,380.61 ; 771.07,461.07 cw(c799.19,432.95) 804.5,472.37 ; 802.5,470 780,470 760,450 ; v1@842.93,852.93 cw(c807.75,817.75) 857.5,817.75 ; v1@842.93,867.07 ccw(c807.75,902.25) 857.5,902.25 ; 857.5,910 857.5,810 862.5,805 952.5,805 984.95,837.45 ; 861.04,813.54 ccw(c881.64,834.14) 881.64,805 ; 960.13,812.63 ccw(c930.25,842.5) 972.5,842.5 ; 964.22,816.72 cw(c985.46,795.48) v1@992.26,824.74 ; v1@982.42,808.48 cw(c997.74,821.66) 983.45,835.95 ; v1@1040.75,273.79 cw(c1064.91,263.89) 1064.91,290 ; v1(1050,270) 1070,290 1090,290 ; v1@1050,280 ccw(c1050,304.14) 1067.07,287.07 ccw(c1084.14,270) v1@1060,270 ; v1@1056.16,276.16 cw(c1077.5,254.82) 1077.5,285 ; v1@1059.25,266.21 cw(c1094.72,251.67) 1094.72,290 ; 1060,1365 1075,1350 ; 1470,272.5 cw(c1470,254.39) v1@1482.8,267.2 ; 1470,290 1470,280 ; 1473.54,281.04 ccw(c1518.28,325.78) 1518.28,262.5 ; 1474.95,278.2 ccw(c1493.05,280.78) v1@1493.05,262.5 ; v1@1480,255.19 ccw(c1445.84,255.84) 1470,280 ; v1@1497.07,247.93 cw(c1532.25,212.75) 1532.25,262.5 ; 1530,782.5 1617.5,782.5 1630,770 ; v1@1537.16,761.21 cw(c1581.18,726.34) 1581.18,782.5 ; v1@1552.84,748.79 cw(c1622.54,693.59) 1622.54,782.5 ; 1600.13,260.13 cw(c1630,230.25) 1630,272.5 ; 1620,290 1630,290 1602.5,262.5 1487.5,262.5 1470,280 ; v1@1622.93,817.93 cw(c1605.86,800.86) 1630,800.86 cw(c1654.14,800.86) v1@1637.07,817.93 ; v1@1622.93,832.07 ccw(c1605.86,849.14) 1630,849.14 ccw(c1654.14,849.14) v1@1637.07,832.07 ; 1630,760 1630,870
  Top Layer w25: 781.16,598.84 ccw(c759.82,620.18) 790,620.18 ccw(c820.18,620.18) 798.84,598.84 ; 781.16,701.16 cw(c759.82,679.82) 790,679.82 cw(c820.18,679.82) 798.84,701.16 ; 781.16,718.84 ccw(c759.82,740.18) 790,740.18 ccw(c820.18,740.18) 798.84,718.84 ; 781.2,718.88 ccw(c760.25,740) 790,740 ; 790,590 790,710 ; 792.5,922.5 cw(c828.71,922.5) 803.11,948.11 ; 798.8,718.88 cw(c819.75,740) 790,740 ; 821.95,1231.2 cw(c754.24,1163.49) 850,1163.49 cw(c945.76,1163.49) 878.05,1231.2 ; 823.6,968.6 ccw(c781.96,1010.24) 840.85,1010.24 ; 843.53,1077.73 ccw(c827.9,1093.36) 850,1093.36 ccw(c872.1,1093.36) 856.47,1077.73 ; 850,1259.25 850,1040.75 840,1030.75 840,985 ; 852.46,1001.42 ccw(c857.05,985) 840,985 ; 861.16,268.84 ccw(c839.82,290.18) 870,290.18 ccw(c900.18,290.18) 878.84,268.84 ; 861.16,361.16 cw(c839.82,339.82) 870,339.82 cw(c900.18,339.82) 878.84,361.16 ; 861.16,378.84 ccw(c839.82,400.18) 870,400.18 ccw(c900.18,400.18) 878.84,378.84 ; 867.5,130 ccw(c909.75,130) 879.87,100.13 ; 870,130 870,110 970,10 ; 870,260 870,370 v1(870,415) 870,470 ; 892.5,130 ccw(c995.1,130) 922.55,57.45 ; v1(910,870) 910,915 935,940 935,1035.2 ; 935,965 935,1035.2 ; 940.55,1040.75 935,1035.2 ; 952.97,10 ccw(c911.86,10) 940.93,39.07 ccw(c970,68.14) 970,27.03 ; 790,710 790,740 ; 790,710 790,810 790,910 790,935 815,960 840,985 ; 935,974.73 cw(c976.05,974.73) 947.02,1003.76 ccw(c976.05,974.73) 935,974.73
  Bottom Layer w10: v1(875,1405) 940,1405 1127.5,1217.5 1127.5,1025.69 v1(1254.09,899.09) ; v1@885.61,1394.39 cw(c911.21,1368.79) 911.21,1405 cw(c911.21,1441.21) v1@885.61,1415.61 ; v1(950,275) 1000,325 1000,410 v1(1060,470) ; v1@950,290 ccw(c950,326.21) 975.61,300.61 ccw(c1001.21,275) v1@965,275 ; v1@992.94,1391.76 cw(c986.67,1380) 1000,1380 ; v1@996.2,1408.25 ccw(c1010.46,1396.07) 997.2,1382.8 ; v1(1000,1405) 1000,1380 ; v1@1003.8,1401.75 ccw(c1018.72,1389.02) 1004.85,1375.15 ; v1@1005,930 cw(c1005,893.79) 1030.61,919.39 cw(c1056.21,945) v1@1020,945 ; v1(1005,945) 1055,895 v1(1175,895) ; v1@1007.06,1391.76 ccw(c1013.33,1380) 1000,1380 ; v1@1011.41,1395.26 ccw(c1026.97,1381.97) 1012.5,1367.5 ; v1@1039.39,1045.61 ccw(c1013.79,1071.21) 1050,1071.21 ccw(c1086.21,1071.21) v1@1060.61,1045.61 ; v1@1045,470 cw(c1008.79,470) 1034.39,444.39 cw(c1060,418.79) v1@1060,455 ; v1(1050,1035) 1050,1110 v1(1085,1145) ; v1@1070,1145 cw(c1033.79,1145) 1059.39,1119.39 cw(c1085,1093.79) v1@1085,1130 ; v1(1110,420) 1450,420 ; v1@1120.61,409.39 cw(c1146.21,383.79) 1146.21,420 cw(c1146.21,456.21) v1@1120.61,430.61 ; v1@1164.39,884.39 ccw(c1138.79,858.79) 1138.79,895 ccw(c1138.79,931.21) v1@1164.39,905.61 ; 1170,1579.96 cw(c1170,1520.75) 1211.87,1562.62 cw(c1253.74,1604.49) 1194.53,1604.49 ; 1170,1589.96 cw(c1170,1554.89) 1194.8,1579.69 cw(c1219.6,1604.49) 1184.53,1604.49 ; 1170,1604.49 1270,1504.49 v1(1270,1200) ; v1@1239.09,899.09 ccw(c1202.88,899.09) 1228.49,924.7 ccw(c1254.09,950.31) v1@1254.09,914.09 ; v1@1259.39,1210.61 ccw(c1233.79,1236.21) 1270,1236.21 ccw(c1306.21,1236.21) v1@1280.61,1210.61 ; v1@1265,1095 cw(c1265,1058.79) 1290.61,1084.39 cw(c1316.21,1110) v1@1280,1110 ; v1(1265,1110) 1385,990 v1(1385,940) ; 1270,1579.96 cw(c1270,1520.75) 1311.87,1562.62 cw(c1353.74,1604.49) 1294.53,1604.49 ; 1270,1589.96 cw(c1270,1554.89) 1294.8,1579.69 cw(c1319.6,1604.49) 1284.53,1604.49 ; 1270,1604.49 1315,1559.49 v1(1315,1240) ; v1@1282.86,674.39 cw(c1253.54,645.08) 1295,645.08 ; v1@1284.39,560.61 ccw(c1258.79,586.21) 1295,586.21 ccw(c1331.21,586.21) v1@1305.61,560.61 ; v1@1284.39,880.61 ccw(c1258.79,906.21) 1295,906.21 ccw(c1331.21,906.21) v1@1305.61,880.61 ; v1(1293.46,685) 1295,683.46 1295,635 ; v1(1295,550) 1295,635 ; 1295,645 1295,635 ; 1295,652.49 cw(c1325.97,652.49) v1@1304.07,674.39 ; v1(1295,870) 1295,915 1155,1055 1155,1225 1000,1380 ; v1@1304.39,1250.61 ccw(c1278.79,1276.21) 1315,1276.21 ccw(c1351.21,1276.21) v1@1325.61,1250.61 ; v1@1349.39,1215.61 ccw(c1323.79,1241.21) 1360,1241.21 ccw(c1396.21,1241.21) v1@1370.61,1215.61 ; v1@1352.48,1140.68 ccw(c1363.57,1159.71) 1379.14,1144.14 ; 1352.66,1587.14 cw(c1334.93,1569.42) 1360,1569.42 cw(c1405.07,1569.42) 1373.2,1601.29 ; v1(1355,1145) 1380,1145 ; v1@1357.52,1149.32 ccw(c1370.32,1171.32) 1388.32,1153.32 ; v1(1360,1205) 1360,1594.49 1370,1604.49 ; 1360,1521.13 cw(c1453.36,1521.13) 1387.34,1587.14 ; 1360,1545.27 cw(c1429.21,1545.27) 1380.27,1594.22 ; v1@1362.55,1157.96 ccw(c1377.08,1182.92) 1397.5,1162.5 ; v1@1374.39,950.61 ccw(c1348.79,976.21) 1385,976.21 ccw(c1421.21,976.21) v1@1395.61,950.61 ; v1@1399.31,565.69 cw(c1399.31,529.48) 1424.92,555.08 cw(c1450.52,580.69) v1@1414.31,580.69 ; v1(1399.31,580.69) 1555,425 1555,305 v1(1640,220) ; v1@1400,510 cw(c1400,473.79) 1425.61,499.39 cw(c1451.21,525) v1@1415,525 ; v1(1400,525) 1535,390 v1(1535,200) ; 1427.25,1562.25 cw(c1470,1519.51) 1470,1579.96 ; 1428.49,1563.49 ccw(c1387.49,1604.49) 1445.47,1604.49 ; v1@1429.39,649.39 cw(c1391.72,611.72) 1445,611.72 ; v1@1436.46,656.46 cw(c1415.86,635.86) 1445,635.86 cw(c1464.14,635.86) v1@1450.61,649.39 ; v1(1440,660) 1445,655 1445,575 1530,490 v1(1575,490) ; 1444.33,1579.33 cw(c1470,1553.65) 1470,1589.96 ; 1445.56,1580.56 ccw(c1421.64,1604.49) 1455.47,1604.49 ; v1@1451.46,411.47 ccw(c1444.7,414.7) 1450,420 ; v1@1458.53,418.54 cw(c1455.3,425.3) 1450,420 ; v1(1465,405) 1450,420 ; 1470,1600 1470,1604.49 1469.49,1604.49 1410,1545 1410,1175 1380,1145 ; v1@1524.39,210.61 ccw(c1498.79,236.21) 1535,236.21 ccw(c1571.21,236.21) v1@1545.61,210.61 ; v1@1564.39,479.39 ccw(c1538.79,453.79) 1538.79,490 ccw(c1538.79,526.21) v1@1564.39,500.61 ; v1@1625,220 ccw(c1588.79,220) 1614.39,245.61 ccw(c1640,271.21) v1@1640,235 ; 1380,1145 ccw(c1380,1131.67) 1368.24,1137.94 cw(c1380,1131.67) 1380,1145 ; 1380,1145 cw(c1380,1158.33) 1368.24,1152.06 ccw(c1380,1158.33) 1380,1145
  Bottom Layer w25: v1(870,415) 910,455 v1(910,870)
  Bottom Layer w30: 845,55 850,50 850,15 ; 865,70 870,65 870,10 ; 875,80 885,70 885,20
  other v1: 1000,80 1490,255 1630,335 755,420 1585,640 1545,755 990,815 1630,825 850,860 755,980 1255,1035 760,1105 1635,1305 1525,1310
  other v3: 392.2,773.94 392.2,962.91

## Polygon pours and split planes (outlines as drawn)
GND on Top Layer "Bottom Layer-No Net" (solid, remove dead copper): -1955,1690 -1955,-60 640,-60 645,-65 645,1695 -1950,1695
no net on Bottom Layer "Bottom Layer-GND" (solid, remove dead copper, pour order 1000): 705,-50 1744.37,-50 1744.37,1666.54 705,1666.54 705,-50
GND on Bottom Layer "Bottom Layer-No Net" (solid, remove dead copper): -1950,1695 -1955,1690 -1955,-70 645,-70 650,-75 645,-70 645,1695 -1950,1695 -1955,1690

## Keep-outs
Keep-Out Layer:
  lines w6: -1955,-25 -1955,1690 ; -1955,-5 -1955,-70 -1950,-75 -1870,-75 ; -1950,1695 30,1695 ; -1905,-75 -695,-75 ; -705,-75 650,-75 645,-70 645,1630 ; 15,1695 580,1695 ; 490,1695 635,1695 645,1685 645,1615
  lines w8: 545,-75 1719.37,-75 1744.37,-50 ; 620,1695 1725,1695 1744.37,1675.63 1744.37,1615 ; 645,1695 645,-70 650,-75 ; 700,1695 700,-70 ; 705,-75 700,-70 ; 1744.37,-30 1744.37,-69.37 1745,-70 700,-70
  lines w10: 1744.37,1660.91 1744.37,-50 705,-50 705,1666.54 1744.37,1666.54

## Silkscreen, mask and mechanical layers (free items; w line width, h text height)
Top Overlay:
  text "V1.0" at 780,1365 h40 r90
  text "XiRei" at -1610,345 h60
  text "TCP_V1.0" at -1620,230 h60
  text "20130608" at -1615,120 h60